# Altium PCB Draft1.PcbDoc
Units mil, origin at the board's own origin, x right, y up, seen from the top; angles counter-clockwise.
Board outline 2000 x 3350 mil, 2 copper layers (Top Layer, Bottom Layer); 65 components, 26 nets, 173 pads, 228 vias.
Unrouted connection lines stored in the file: 1.
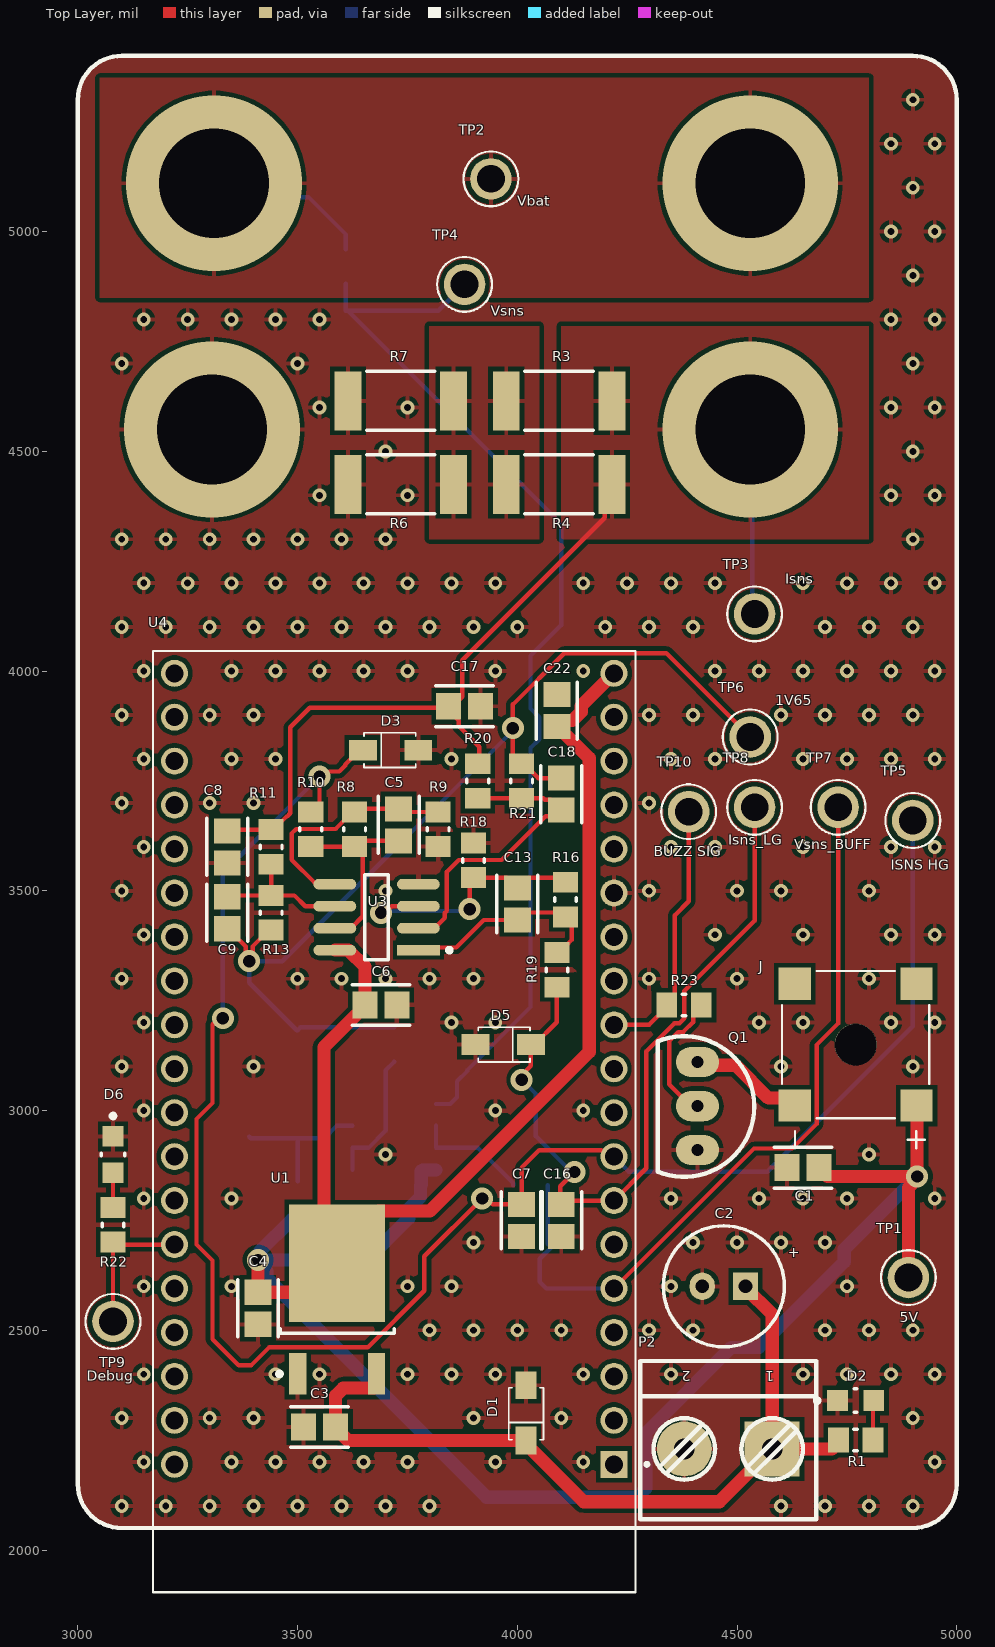
[diagram p0: Top Layer view]
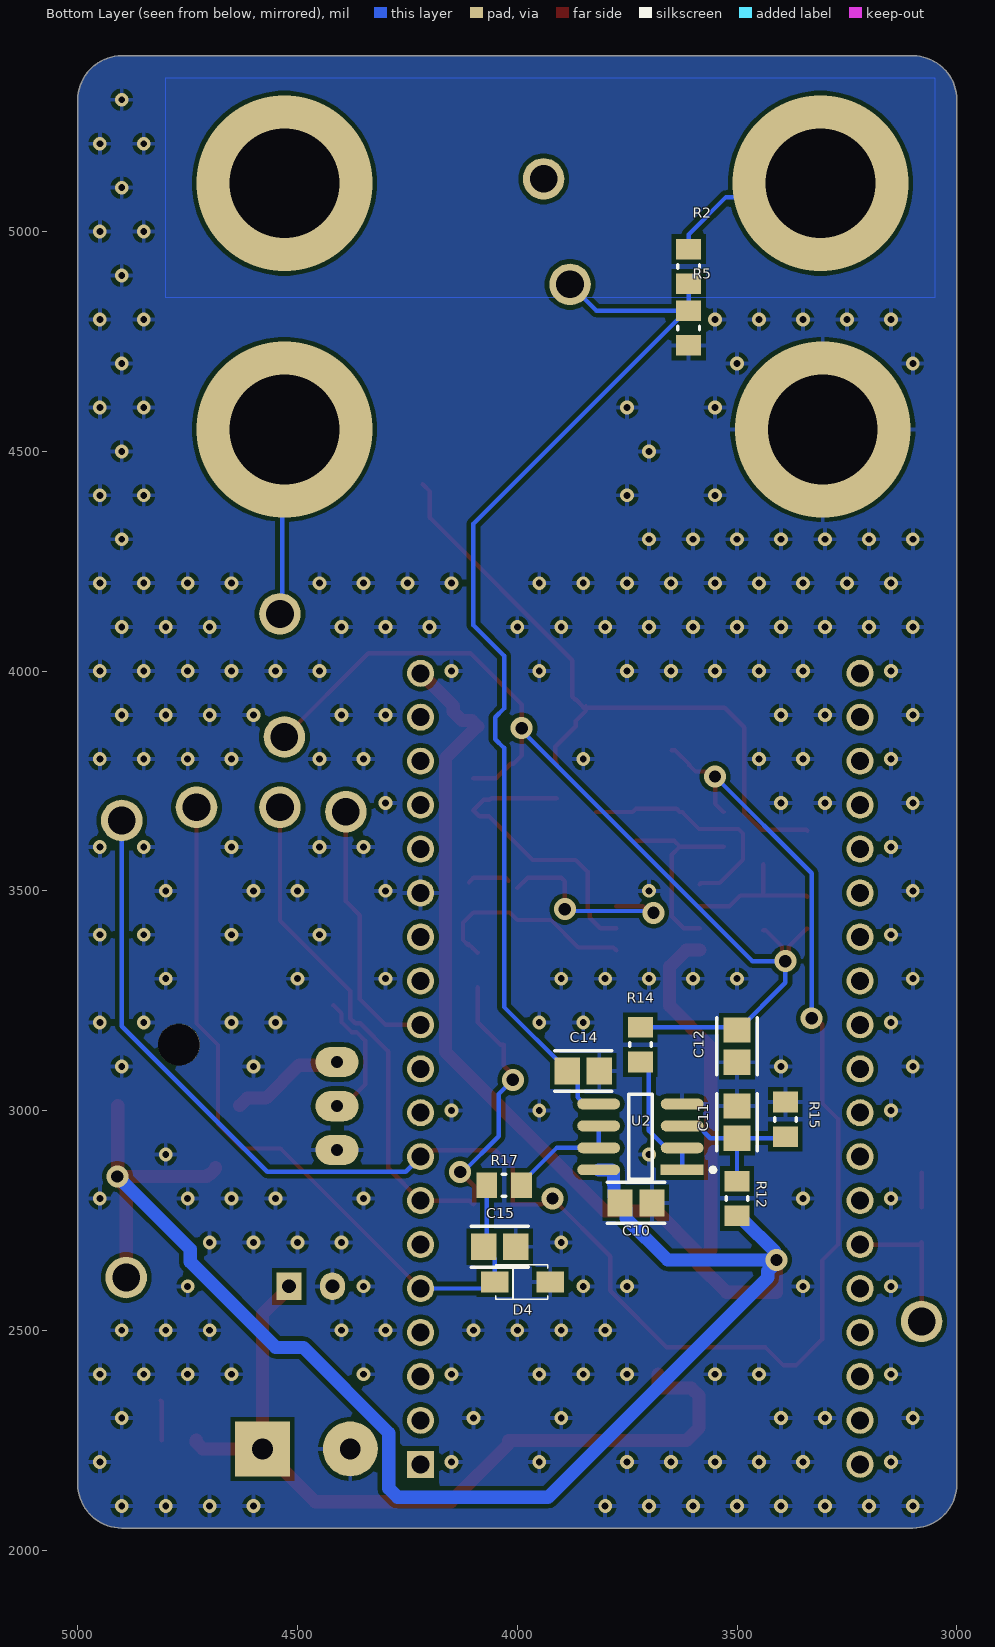
[diagram p1: Bottom Layer view, seen from below]
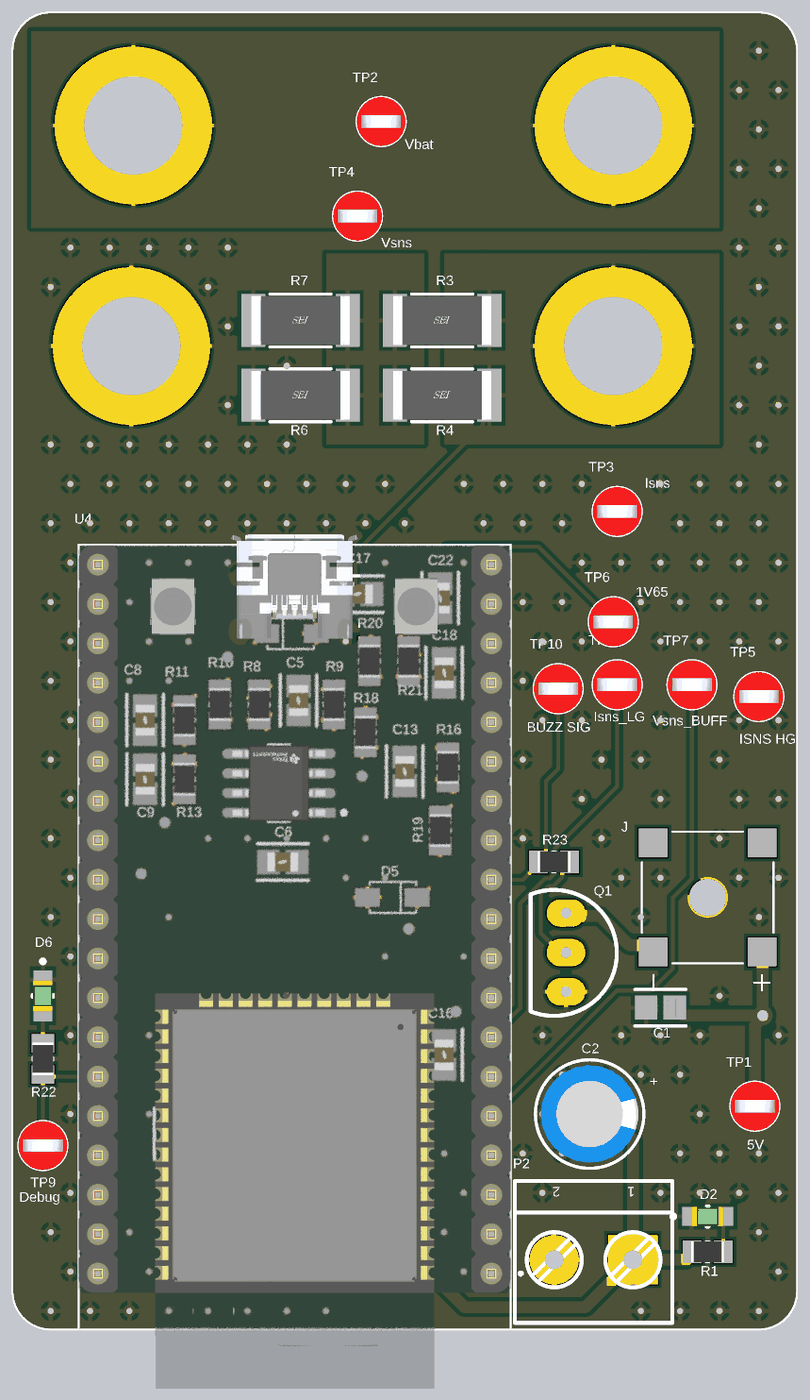
[diagram p2: 3D render of the assembled board from above, using the file's embedded part models]
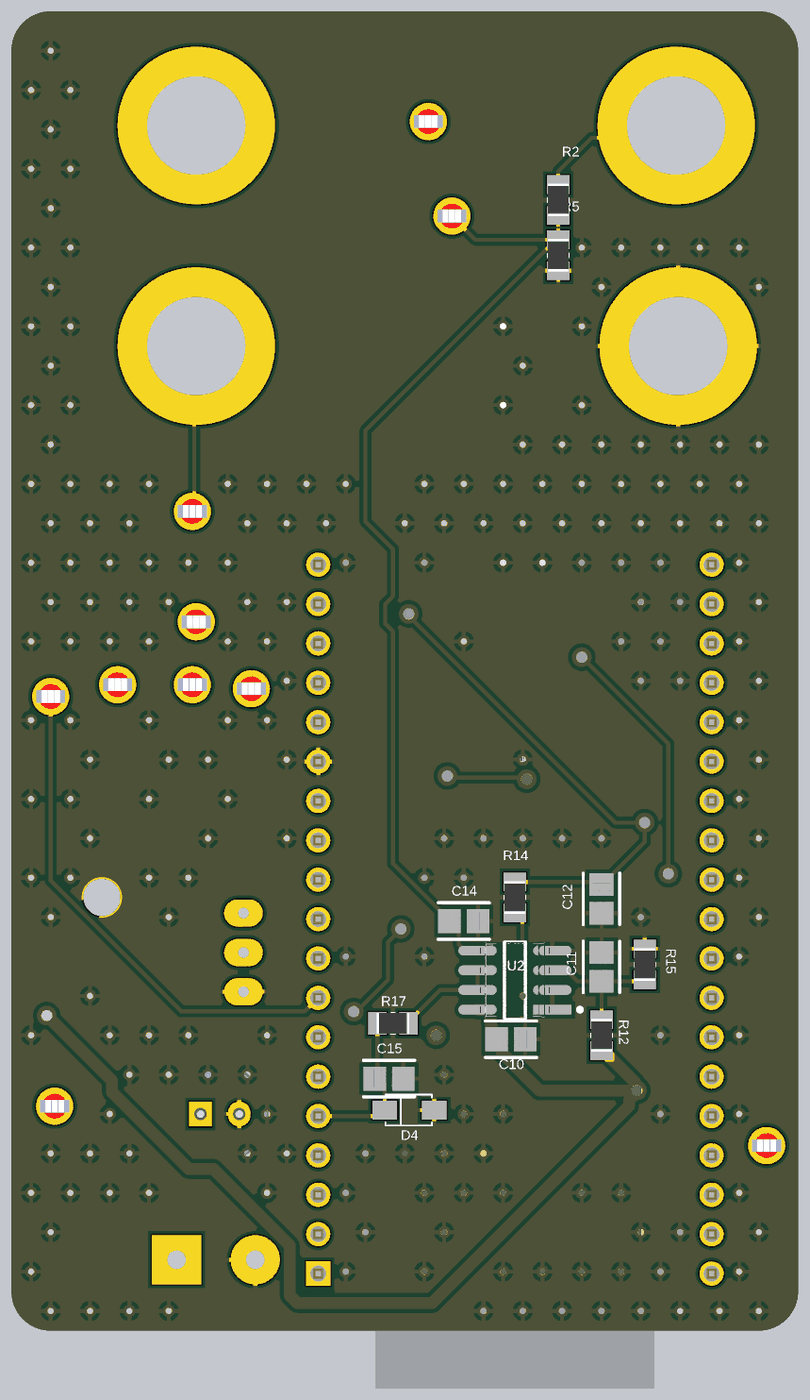
[diagram p3: 3D render of the assembled board from below, using the file's embedded part models]

## Layer stack, top to bottom
Top Solder: solder mask 0.4, Solder Resist, Dk 3.5
Top Layer: signal copper 1.4
Dielectric 1: dielectric 12.6, FR-4, Dk 4.8
Bottom Layer: signal copper 1.4
Bottom Solder: solder mask 0.4, Solder Resist, Dk 3.5

## Board outline
3000,2150 3000,5300 cw(c3100,5300) 3100,5400 4900,5400 cw(c4900,5300) 5000,5300 5000,2150 cw(c4900,2150) 4900,2050 3100,2050 cw(c3100,2150)

## Design rules (kind name [scope] priority, off if disabled: settings)
Clearance [All] p1: gap=10 ignorepadtopadclearanceinfootprint=TRUE except(0: Arc-Hole Track-Hole SMDPad-Hole THPad-Hole Via-Hole Fill-Hole Poly-Hole Region-Hole Text-Hole; 8: Arc-SMDPad Track-SMDPad)
PolygonConnect Lug_Points [InNetClass('Current_Path') vs InNetClass('Current_Path')] p1: connectstyle=Direct reliefconductorwidth=10 reliefentries=4 polygonreliefangle="90 Angle" airgapwidth=10
PolygonConnect PolygonConnect_1 [All] p2: connectstyle=Relief reliefconductorwidth=10 reliefentries=4 polygonreliefangle="90 Angle" airgapwidth=10
RoutingVias [All] p1: holewidth=28 width=50 viastyle="Through Hole" minholewidth=28 minwidth=50 maxholewidth=28 maxwidth=50
SolderMaskExpansion [All] p1: expansion=4 istentingtop=FALSE
SupplyNets "Schematic Supply Nets_1" [InNet('5V')] p1: voltage=0.000
SupplyNets "Schematic Supply Nets" [InNet('GND')] p2: voltage=0.000
Width Power_Width [InNetClass('Power')] p1: maxlimit=40 minlimit=30 preferedwidth=30
Width Width_1 [All] p2: maxlimit=10 minlimit=10 preferedwidth=10
30 further rules are at their usual default settings.

## Classes and differential pairs
net class Power: 5V 12V NetJ_N
component class ESP32: C1 C22 D6 J Q1 Q? R22 R23 TP9 TP10 U4
component class Sensing: C2 C3 C4 C5 C6 C7 C8 C9 C10 C11 C12 C13 C14 C15 C16 C17 C18 D1 D2 D3 D4 D5 P2 R1 R2 R3 R4 R5 R6 R7 R8 R9 R10 R11 R12 R13 R14 R15 R16 R17 R18 R19 R20 R21 TP1 TP2 TP3 TP4 TP5 TP6 TP7 TP8 U1 U2 U3

## Components (designator, comment, footprint, x,y, rotation, side; value= is the part's Value field where it differs from the comment)
C1 "CL21B104KBCNNNC" FP-CL21-IPC_A 4650,2870 r180 top
C2 "*" "CAP-RAD-2.5mm Pitch" 4470,2600 r180 top
C3 "CL21B104KBCNNNC" FP-CL21-IPC_A 3550,2280 r180 top
C4 "CL21B104KBCNNNC" FP-CL21-IPC_A 3410,2550 r270 top
C5 "CL21B104KBCNNNC" FP-CL21-IPC_A 3730,3650 r90 top
C6 "CL21B104KBCNNNC" FP-CL21-IPC_A 3690,3240 r0 top
C7 "CL21B104KBCNNNC" FP-CL21-IPC_A 4010,2750 r270 top
C8 "CL21B104KBCNNNC" FP-CL21-IPC_A 3340,3600 r270 top
C9 "CL21B104KBCNNNC" FP-CL21-IPC_A 3340,3450 r90 top
C10 "CL21B104KBCNNNC" FP-CL21-IPC_A 3730,2790 r180 bottom
C11 "CL21B104KBCNNNC" FP-CL21-IPC_A 3500,2973.55 r90 bottom
C12 "CL21B104KBCNNNC" FP-CL21-IPC_A 3500,3146.45 r270 bottom
C13 "CL21B104KBCNNNC" FP-CL21-IPC_A 4000,3470 r90 top
C14 "CL21B104KBCNNNC" FP-CL21-IPC_A 3850,3090 r180 bottom
C15 "CL21B104KBCNNNC" FP-CL21-IPC_A 4040,2690 r180 bottom
C16 "CL21B104KBCNNNC" FP-CL21-IPC_A 4100,2750 r270 top
C17 "CL21B104KBCNNNC" FP-CL21-IPC_A 3880,3920 r0 top
C18 "CL21B104KBCNNNC" FP-CL21-IPC_A 4100,3720 r270 top
C22 "CL21B104KBCNNNC" FP-CL21-IPC_A 4090,3910 r90 top
D1 "BZT52H-B4V7" SOD123 4020,2310 r270 top
D2 "LTST-C170GKT" FP-LTST-C170GKT-MFG 4770,2340 r0 top
D3 "BZT52H-B4V7" SOD123 3710,3820 r180 top
D4 "BZT52H-B4V7" SOD123 3990,2610 r0 bottom
D5 "BZT52H-B4V7" SOD123 3970,3150 r0 top
D6 "LTST-C170GKT" FP-LTST-C170GKT-MFG 3080,2900 r270 top
J "OWMB-858540SA-40-15" 3949-OWMB-858540SA-40-15CT-ND 4770,3150 r270 top
P2 "Connector2way" ece-TER-2.02 4580,2230 r270 top
Q1 "BC547/549" ece-TO-92Z 4410,3110.39 r270 top
R1 "RC0805FR-071KL" RESC2013X60X35ML10T20 4770,2250 r180 top
R2 "RC0805FR-071KL" RESC2013X60X35ML10T20 3610,4920.63 r90 bottom
R3 "D1MPAB2512QR002FA-T4" "2512 Res" 4095,4615 r0 top
R4 "D1MPAB2512QR002FA-T4" "2512 Res" 4095,4425 r0 top
R5 "RC0805FR-071KL" RESC2013X60X35ML10T20 3610,4780.63 r90 bottom
R6 "D1MPAB2512QR002FA-T4" "2512 Res" 3735,4425 r0 top
R7 "D1MPAB2512QR002FA-T4" "2512 Res" 3734.89,4615 r0 top
R8 "RC0805FR-071KL" RESC2013X60X35ML10T20 3630,3640 r270 top
R9 "RC0805FR-071KL" RESC2013X60X35ML10T20 3820,3640 r90 top
R10 "RC0805FR-071KL" RESC2013X60X35ML10T20 3530,3640 r90 top
R11 "RC0805FR-071KL" RESC2013X60X35ML10T20 3440,3600 r270 top
R12 "RC0805FR-071KL" RESC2013X60X35ML10T20 3500,2800 r270 bottom
R13 "RC0805FR-071KL" RESC2013X60X35ML10T20 3440,3450 r90 top
R14 "RC0805FR-071KL" RESC2013X60X35ML10T20 3720,3150 r90 bottom
R15 "RC0805FR-071KL" RESC2013X60X35ML10T20 3390,2980 r270 bottom
R16 "RC0805FR-071KL" RESC2013X60X35ML10T20 4110,3480 r270 top
R17 "RC0805FR-071KL" RESC2013X60X35ML10T20 4030,2830 r0 bottom
R18 "RC0805FR-071KL" RESC2013X60X35ML10T20 3900,3569.37 r270 top
R19 "RC0805FR-071KL" RESC2013X60X35ML10T20 4090,3320 r270 top
R20 "RC0805FR-071KL" RESC2013X60X35ML10T20 3910,3750 r270 top
R21 "RC0805FR-071KL" RESC2013X60X35ML10T20 4010,3750 r270 top
R22 "RC0805FR-071KL" RESC2013X60X35ML10T20 3080,2740 r270 top
R23 "RC0805FR-071KL" RESC2013X60X35ML10T20 4379.37,3240 r0 top locked
TP1 "5010" TP_5010 4890,2620 r0 top
TP2 "5010" TP_5010 3940,5120 r0 top
TP3 "5010" TP_5010 4540,4130 r0 top
TP4 "5010" TP_5010 3880,4880 r0 top
TP5 "5010" TP_5010 4900,3660 r0 top
TP6 "5010" TP_5010 4530,3850 r0 top
TP7 "5010" TP_5010 4730,3690 r0 top
TP8 "5010" TP_5010 4540,3690 r0 top
TP9 "5010" TP_5010 3080,2520 r0 top
TP10 "5010" TP_5010 4390,3680 r0 top
U1 "LD1117DT50CTR" TO-252_M 3590,2570 r90 top
U2 "LM358BIDR" FP-D0008A-IPC_A 3720,2940 r0 bottom
U3 "LM358BIDR" FP-D0008A-IPC_A 3680,3440 r180 top
U4 "ESP32-DEVKITC-32D" MODULE_ESP32-DEVKITC-32D 3720,2972.95 r180 top

## Footprints (in the part's own frame and the unit in brackets; to place one, negate y for a bottom-side part, rotate by r counter-clockwise, add the part's x,y. Pads: shape width x height; smd on the part's side, far side on the other; paste and mask are expansions set on the pad)
"2512 Res" [mil]
  rect 61.21x134.18 smd paste+0 mask+0: 1(-120.11,0) 2(120.11,0)
  silkscreen extent -78,-67 78,67, body extent -170,-87 170,87, height 10
3949-OWMB-858540SA-40-15CT-ND [mm] "SMT BUZZER"
  rect 1.86x1.86 smd: N(3.52,-3.52) P(3.52,3.52) SH1(-3.52,3.52) SH2(-3.52,-3.52)
  round 2.4 hole 2.4 unplated: ""(0,0)
  silkscreen extent -4.25,-4.25 6,4.25
"CAP-RAD-2.5mm Pitch" [mm] "Cap 6.3 X 11.2"
  rect 1.45x1.6 hole 0.8: 1(-1.25,0)
  oval 1.45x1.6 hole 0.8: 2(1.25,0)
  silkscreen extent -3.5,-3.5 3.5,3.5, body extent -3.15,-3.15 3.15,3.15, height 11.5
ece-TER-2.02 [mm]
  rect 3.175x3.175 hole 1.2: 1(0,0)
  round 3.175 hole 1.2: 2(0,-5.08)
  silkscreen extent -5.08,-7.62 4.06,2.54
ece-TO-92Z [mm]
  oval 1.75x2.5 hole 0.7: 1(0,0) 2(2.55,0) 3(5.08,0)
  silkscreen extent -1.49,-2.29 6.63,3.28
FP-CL21-IPC_A [mil]
  rect 57.27x61.27 smd paste+0 mask+0: 1(-36.45,0) 2(36.45,0)
  silkscreen extent -65,-46 65,46, body extent -85,-50 85,50, height 10
FP-D0008A-IPC_A [mil]
  rect 97.21x24.49 smd paste+0 mask+0: 1(-95.02,75)
  rrect100% 97.21x24.49 smd paste+0 mask+0: 2(-95.02,25) 3(-95.02,-25) 4(-95.02,-75) 5(95.02,-75) 6(95.02,-25) 7(95.02,25) 8(95.02,75)
  silkscreen extent -170,-97 27,97, body extent -118,-96 118,96, height 69
FP-LTST-C170GKT-MFG [mm]
  rect 1.2x1.2 smd paste+0 mask+0: 1(-1.05,0) 2(1.05,0)
  silkscreen extent -2.35,-0.67 0.08,0.67, body extent -1.75,-0.77 1.75,0.77, height 0.25
MODULE_ESP32-DEVKITC-32D [mm]
  rect 1.56x1.56 / inner round 1.56 / far side rect 1.56x1.56 hole 1.04: J2-1(-12.7,19.76)
  round 1.56 hole 1.04: J2-2(-12.7,17.22) J2-3(-12.7,14.68) J2-4(-12.7,12.14) J2-5(-12.7,9.6) J2-6(-12.7,7.06) J2-7(-12.7,4.52) J2-8(-12.7,1.98) J2-9(-12.7,-0.56) J2-10(-12.7,-3.1) J2-11(-12.7,-5.64) J2-12(-12.7,-8.18) J2-13(-12.7,-10.72) J2-14(-12.7,-13.26) J2-15(-12.7,-15.8) J2-16(-12.7,-18.34) J2-17(-12.7,-20.88) J2-18(-12.7,-23.42) J2-19(-12.7,-25.96) J3-1(12.7,19.76) J3-2(12.7,17.22) J3-3(12.7,14.68) J3-4(12.7,12.14) J3-5(12.7,9.6) J3-6(12.7,7.06) J3-7(12.7,4.52) J3-8(12.7,1.98) J3-9(12.7,-0.56) J3-10(12.7,-3.1) J3-11(12.7,-5.64) J3-12(12.7,-8.18) J3-13(12.7,-10.72) J3-14(12.7,-13.26) J3-15(12.7,-15.8) J3-16(12.7,-18.34) J3-17(12.7,-20.88) J3-18(12.7,-23.42) J3-19(12.7,-25.96)
  silkscreen extent -14.7,-27.25 13.95,27.15, body extent -13.97,-27.9 13.97,27.2, height 9.23
RESC2013X60X35ML10T20 [mm] "Chip Resistor, 2-Leads, Body 2.1x1.35mm, IPC Low Density"
  rect 1.2x1.45 smd: 1(-1,0) 2(1,0)
  silkscreen extent -0.1,-0.63 0.1,0.63, body extent -1.05,-0.68 1.05,0.67, height 0.6
SOD123 [mm] "SOD-123; 2 Leads; Body 2.7 x 1.6 mm, (LxW)"
  rect 1.6x1.2 smd: 1(-1.65,0) 2(1.55,0)
  silkscreen extent -1.5,-1 1.5,1, body extent -1.8,-0.86 1.8,0.86, height 1.21
TO-252_M [mm] "D-PAK, 4-Leads, Body 6.1x6.5mm, Pitch 2.28mm, Lead Span 9.7mm, IPC Low Density"
  rect 2.4x1 smd: 1(-4.3,2.28) 3(-4.3,-2.28)
  rect 6.8x5.55 smd: 4(2.1,0)
  silkscreen extent -4.42,-3.3 -1.7,3.45, body extent -1.95,-3.3 4.25,3.3, height 2.4
TP_5010 [mm]
  round 2.4 hole 1.6: TP(0,0)
  silkscreen extent -1.59,-1.58 1.59,1.58, body extent -1.59,-1.59 1.59,1.59, height 8.13

## Part data
C1 C3 C4 C5 C6 C7 C8 C9 C10 C11 C12 C13 C14 C15 C16 C17 C18 C22: library part 0805CAP, "0805 Cap General Purpose", Capacitance=999uF, Case Code (Imperial)=0805, Case Code (Metric)=2012, Dielectric=X7R, Max Operating Temperature=125°C, Min Operating Temperature=-55°C, Tolerance=10%, Voltage=50V, Case/Package=0805, Contact Plating=Tin, Depth=1.25mm, Height=0.85mm, Lead Free="Lead Free", Length=2mm, Material=Ceramic, Mount="Surface Mount", Packaging="Tape and Reel", Radiation Hardening=No, Thickness=0.037inch, Voltage Rating=50V, Voltage Rating (DC)=50V, Width=0.049inch
C2: library part ElecCap_TH_2P0, "Electrolytic capacitor with radial package, 2mm pitch and 5.2mm diameter", LatestRevisionDate=17-Jul-2002, LatestRevisionNote="Re-released for DXP Platform.", PackageDescription="Polarized Capacitor; 2 Leads", PackageReference=POLAR0.8, Published=8-Jun-2000, Publisher="Altium Limited"
D1 D3 D4 D5: library part Zener_SMT_SOD123, "SMT zener diode with SOD123 package", Manufacturer="Nexperia USA Inc.", Manufacturer Part Number=BZT52H-B4V7,115, Operating Temperature="-65°C ~ 150°C (TA)", Package / Case=SOD-123F, Supplier Part Number 1=1727-1611-1-ND, Tolerance=±2%, Category="Discrete Semiconductor Products", ComponentLink1Description=https://assets.nexperia.com/documents/data-sheet/BZT52H_SER.pdf, ComponentLink1URL=https://assets.nexperia.com/documents/data-sheet/BZT52H_SER.pdf, Mounting Type="Surface Mount", Packaging="Cut Tape (CT)", Part Status=Active, Pricing 1="1=0.51, 10=0.408, 100=0.2164, 500=0.14232, 1000=0.09678 (NZD)", RoHS="RoHS Compliant", Stock 1=0, Supplier 1=Digi-Key, Supplier Device Package=SOD-123F
D2 D6: library part CMP-1674-00002-6, "LED yellow green 0805 wavelength 569nm light intensity 6mcd Front Mounting", Case Code (Imperial)=0805, Case Code (Metric)=2012, Color=Green, Current=4A, Forward Current=30mA, Forward Voltage=2.1V, Lens Color=Colorless, Manufacturer=Lite-On, Max Operating Temperature=85°C, Min Operating Temperature=-55°C, Package Quantity=1, Power Dissipation=100mW, Reverse Voltage=5V, Test Current=10mA, Case/Package=0805, Category=LEDs, China RoHS=Compliant, ComponentLink1Description=https://datasheet.octopart.com:443/LTST-C170GKT-Lite-On-datasheet-180605137.pdf?src-supplier=IHS, ComponentLink1URL=https://datasheet.octopart.com:443/LTST-C170GKT-Lite-On-datasheet-180605137.pdf?src-supplier=IHS, ComponentLink2Description=https://datasheet.octopart.com:443/LTST-C170GKT-Lite-On-datasheet-141439001.pdf?src-supplier=Upverter, ComponentLink2URL=https://datasheet.octopart.com:443/LTST-C170GKT-Lite-On-datasheet-141439001.pdf?src-supplier=Upverter, ComponentLink3Description=https://datasheet.octopart.com:443/LTST-C170GKT-Lite-On-datasheet-159307.pdf?src-supplier=Arrow+Electronics, ComponentLink3URL=https://datasheet.octopart.com:443/LTST-C170GKT-Lite-On-datasheet-159307.pdf?src-supplier=Arrow+Electronics, ComponentLink4Description=https://datasheet.octopart.com:443/LTST-C170GKT-Lite-On-datasheet-8330158.pdf?src-supplier=TME, ComponentLink4URL=https://datasheet.octopart.com:443/LTST-C170GKT-Lite-On-datasheet-8330158.pdf?src-supplier=TME, ComponentLink5Description=https://datasheet.octopart.com:443/LTST-C170GKT-Lite-On-datasheet-26684672.pdf?src-supplier=Future+Electronics, ComponentLink5URL=https://datasheet.octopart.com:443/LTST-C170GKT-Lite-On-datasheet-26684672.pdf?src-supplier=Future+Electronics, ComponentLink6Description=https://datasheet.octopart.com:443/LTST-C170GKT-Lite-On-datasheet-59241.pdf?src-supplier=DigiKey, ComponentLink6URL=https://datasheet.octopart.com:443/LTST-C170GKT-Lite-On-datasheet-59241.pdf?src-supplier=DigiKey, ComponentLink7Description=https://datasheet.octopart.com:443/LTST-C170GKT-Lite-On-datasheet-14174986.pdf?src-supplier=iiiC, ComponentLink7URL=https://datasheet.octopart.com:443/LTST-C170GKT-Lite-On-datasheet-14174986.pdf?src-supplier=iiiC, Country of Origin="Mainland China", Depth=1.25mm, Dominant Wavelength=569nm, Export Control Classification Number (ECCN) Code=EAR99, Harmonized Tariff Schedule (HTS) Code=8541.40.20.00, Height=1.1mm, Illumination Color=Green, Introduction Date=1997-12-01, Lead Free="Lead Free", Length=2mm, Lens Style=Diffused, Lens Transparency=Clear, Lifecycle Status=Production, Luminous Intensity=6mcd, Manufacturer Part Number=LTST-C170GKT, Mount="Surface Mount", Mounting Technology="Surface Mount", Number of Circuits=1, Number of Elements=1, Number of LEDs=1, Number of Pins=2, Number of Terminals=2, Packaging="Tape and Reel", Peak Wavelength=565nm, Pins=2, Power Rating=100mW, Pricing="3000=0.03046, 6000=0.02977, 12000=0.02908, 24000=0.0284, 48000=0.02771 (USD)", Radiation Hardening=No, REACH SVHC=Yes, RoHS=Compliant, Schedule B="8541402000, 8541402000|8541402000|8541402000|8541402000|8541402000|8541402000|8541402000|8541402000|8541402000|8541402000|8541402000|8541402000|8541402000|8541402000|8541402000|8541402000|8541402000|8541402000|8541402000|8541402000|8541402000|8541402000|8541402000|85", Shape=Rectangular, Stock=408000, Supplier=Avnet, Supplier Part Number=LTST-C170GKT, Terminal Pitch=2.1mm, Viewing Angle=130°, Voltage=5V, Wavelength=565nm, Width=1.25mm
J: "Buzzer Magn 5V 8.5X8.5MMSMD", Manufacturer="Ole Wolff", Supplier Part Number=3949-OWMB-858540SA-40-15DKR-ND, Category="Audio Products", Manufacturer Part Number=OWMB-858540SA-40-15, Pricing="1=1.01, 10=0.79, 25=0.7184, 50=0.6688, 100=0.6234, 250=0.56864, 500=0.5355 (USD)", Supplier=DigiKey
P2: "2 way screw connector"
Q1: "NPN Transistor"
R1 R2 R5 R8 R9 R10 R11 R12 R13 R14 R15 R16 R17 R18 R19 R20 R21 R22 R23: library part 0805RESISTOR, "0805 General Purpose  0.125W SMD", Case Code (Imperial)=0805, Case Code (Metric)=2012, Manufacturer=Yageo, Max Operating Temperature=155degC, Max Power Dissipation=125mW, Min Operating Temperature=-55degC, Package Description="2-Pin Surface Mounted Device, Body 2 x 1.25 mm", Package Quantity=1, Resistance=9K99, Temperature Coefficient=100ppm/degreesC, Tolerance=1%, Voltage Rating=150V, Case/Package=0805, Composition=ThickFilm, Datasheet URL=http://www.yageo.com/NewPortal/yageodocoutput?fileName=/pdf/R-Chip/PYu-RC_Group_51_RoHS_L_5.pdf, Datasheet Version="Rev. 5, 10/2016", Depth=1.25mm, Height=0.024inch, Lead Free=LeadFree, Length=0.079inch, Manufacturer URL=http://www.yageo.com/, Military Standard=Not, Number of Pins=2, Number of Terminations=2, Package Reference=0805, Packaging=TapeandReel, Power Rating=125mW, REACH SVHC=Unknown, RoHSCompliant=true, Termination=SMD/SMT, Voltage Rating (DC)=150V, Width=0.049inch
R3 R4 R6 R7: "Res 0.002 Ohm 1% 2W 2512", Manufacturer="Thin Film Tech", Supplier Part Number=4463-D1MPAB2512QR002FA-T4CT-ND, Category="Chip SMD Resistors", Manufacturer Part Number=D1MPAB2512QR002FA-T4, Pricing="1=0.47, 10=0.299, 25=0.2532, 50=0.2248, 100=0.2006, 250=0.17396, 500=0.1573, 1000=0.14313 (USD)", Stock=90233, Supplier=DigiKey
TP1 TP2 TP3 TP4 TP5 TP6 TP7 TP8 TP9 TP10: "Test Point MultiPurpose THM .445 L .125 OD Heat Resistant Nylon 46 Red", Package="NON STANDARD-1 Keystone", Check_prices=https://www.snapeda.com/parts/5010/Keystone/view-part/?ref=eda, MF="Keystone Electronics", MP=5010, SnapEDA_Link=https://www.snapeda.com/parts/5010/Keystone/view-part/?ref=snap
U1: library part CMP-0244-00109-1, "Fixed Low Drop Positive Voltage Regulator, 5V, 3-Pin DPAK, Tape and Reel", ComponentLink1Description="Manufacturer URL", ComponentLink1URL=http://www.st.com, ComponentLink2Description=Datasheet, ComponentLink2URL=http://www.st.com/internet/com/TECHNICAL_RESOURCES/TECHNICAL_LITERATURE/DATASHEET/CD00000544.pdf, DatasheetVersion=1/11/2011, PackageDescription="3-Pin Transistor Outline Package 2.28 mm Pitch, 9.7 mm Lead Span (DPAK)", PackageReference=TO-252, PackageVersion=2011
U2 U3: library part CMP-04895-000094-1, "IC OPAMP GP 2 CIRCUIT 8SOIC", RoHS Compliant=Yes
U4: "WiFi Development Tools (802.11) ESP32 General Development Kit, ESP32-WROOM-32D on the board", Package=None, Check_prices=https://www.snapeda.com/parts/ESP32-DEVKITC-32D/Espressif+Systems/view-part/?ref=eda, MF="Espressif Systems", MP=ESP32-DEVKITC-32D, SnapEDA_Link=https://www.snapeda.com/parts/ESP32-DEVKITC-32D/Espressif+Systems/view-part/?ref=snap

## Via types
v1: diameter 31.5, hole 15.75, Top Layer to Bottom Layer, tented both sides, 213 vias
v2: diameter 50, hole 28, Top Layer to Bottom Layer, tented both sides, 11 vias
v3: diameter 400, hole 250, Top Layer to Bottom Layer, 4 vias

## Nets (pads, with @x,y where several pads share a name; then routed paths per layer and width w, separated by ;. In a path a pad name is that pad's centre, name@x,y a point inside that pad or via, vN(x,y) a via of type N, cw(c..) or ccw(c..) an arc to the next point about the centre after c; other vN are vias at no path point)
1v65: C9.1 C12.1 C18.1 R13.1 R14.2 R21.1 TP6.TP | length 2353.4
  Top Layer w10: C9.1 3342,3413.55 3382.35,3373.2 3382.35,3347.65 v2(3390,3340) 3397.65,3347.65 3397.65,3373.2 3435.08,3410.63 R13.1 ; C18.1 4047.84,3756.45 4014.92,3789.37 R21.1 4008.62,3789.37 3990,3807.99 v2(3990,3870) 3990,3924.1 4106.61,4040.71 4339.29,4040.71 TP6.TP
  Bottom Layer w10: R14.2 3506.47,3189.37 C12.1 3498,3182.9 3390,3290.9 v2(3390,3340) 3465,3340 3990,3865 v2(3990,3870)
5V: C1.1 C4.1 C6.1 C10.1 C22.1 J.P R12.2 TP1.TP U1.4 U2.8 U3.8 U4.J2-19 | length 6276.5
  Top Layer w30: v2(3410,2660) C4.1 3523.77,2586.45 U1.4 ; U3.8 3615.83,3365 3653.55,3327.28 3653.55,3238 3560,3144.45 3560,2682.68 U1.4 ; U4.J2-19 4145.63,3920.63 4145.63,3907.46 4125.36,3887.19 4103.63,3887.19 C22.1 4092,3873.55 4163.54,3802.01 4163.54,3133.54 3801.54,2771.54 3684.25,2771.54 3590,2677.28 U1.4 ; C1.1 4686.45,2868 4700.08,2854.37 4702.08,2854.37 4706.45,2850 v2(4910,2850) ; TP1.TP 4890,2824.59 4910,2844.59 v2(4910,2850) ; J.P 4909.29,3010.71 4909.29,2850.71 v2(4910,2850)
  Bottom Layer w30: R12.2 3491.38,2752.01 3486.46,2752.01 3413.83,2679.38 3413.83,2663.83 v2(3410,2660) ; U2.8 3784.17,2865 3781.42,2862.25 3781.42,2831.39 3780.08,2830.06 3780.08,2803.63 C10.1 3752.81,2776.37 3752.81,2754.64 3658.18,2660 v2(3410,2660) ; v2(4910,2850) 4744.18,2684.18 4744.18,2655.5 4549.55,2460.87 4487.13,2460.87 4292.5,2266.24 4292.5,2140.07 4272.43,2120 3930,2120 3430,2620 3430,2634.59 3410,2654.59 v2(3410,2660)
12V: C2.1 C3.1 D1.2 P2.1 R1.2 U1.3 | length 1877.4
  Top Layer w30: U1.3 3679.76,2373.15 3675.08,2368.46 3604.02,2368.46 3586.45,2350.89 3586.45,2278 3615.47,2248.98 D1.2 4020,2241.1 4151.1,2110 4460,2110 P2.1 ; C2.1 4519.21,2597.05 4580,2536.26 P2.1 ; R1.2 4730.63,2245.08 4715.55,2230 P2.1
GND: C1.2 C2.2 C3.2 C4.2 C6.2 C7.2 C8.2 C10.2 C11.2 C12.2 C14.2 C15.2 C16.2 C17.2 C22.2 D1.1 D2.1 D3.1 D4.1 D5.1 D6.1 P2.2 Q1.3 R5.1 R6.1 R7.1 R9.1 R15.1 R18.1 U1.1 U2.4 U3.4 U4.J2-14
  other v1: 3100,2100 3200,2100 3300,2100 3400,2100 3500,2100 3600,2100 3700,2100 3800,2100 4600,2100 4700,2100 4800,2100 4900,2100 3150,2200 3350,2200 3450,2200 3550,2200 3650,2200 3750,2200 3950,2200 4150,2200 4950,2200 3100,2300 3300,2300 3400,2300 3900,2300 4100,2300 4900,2300 3150,2400 3450,2400 3550,2400 3750,2400 3850,2400 3950,2400 4150,2400 4350,2400 4650,2400 4750,2400 4850,2400 4950,2400 3800,2500 3900,2500 4000,2500 4100,2500 4300,2500 4400,2500 4700,2500 4800,2500 4900,2500 3150,2600 3350,2600 3750,2600 3850,2600 4350,2600 4750,2600 3900,2700 4400,2700 4500,2700 4600,2700 4700,2700 3150,2800 3350,2800 4350,2800 4550,2800 4650,2800 4750,2800 4950,2800 3700,2900 4800,2900 3150,3000 3950,3000 4150,3000 3100,3100 3400,3100 4600,3100 4900,3100 3150,3200 3850,3200 3950,3200 4550,3200 4650,3200 4850,3200 4950,3200 3100,3300 3500,3300 3600,3300 3700,3300 3800,3300 3900,3300 4300,3300 4500,3300 4800,3300 3150,3400 4450,3400 4650,3400 4850,3400 4950,3400 3100,3500 3700,3500 4300,3500 4500,3500 4600,3500 4800,3500 3150,3600 4350,3600 4450,3600 4650,3600 4850,3600 4950,3600 3100,3700 3300,3700 3400,3700 4300,3700 3150,3800 3350,3800 3450,3800 3850,3800 4350,3800 4450,3800 4650,3800 4750,3800 4850,3800 4950,3800 3100,3900 3300,3900 3400,3900 4300,3900 4400,3900 4600,3900 4700,3900 4800,3900 4900,3900 3150,4000 3350,4000 3450,4000 3550,4000 3650,4000 3750,4000 3950,4000 4150,4000 4450,4000 4550,4000 4650,4000 4750,4000 4850,4000 4950,4000 3100,4100 3200,4100 3300,4100 3400,4100 3500,4100 3600,4100 3700,4100 3800,4100 3900,4100 4000,4100 4200,4100 4300,4100 4400,4100 4700,4100 4800,4100 4900,4100 3150,4200 3250,4200 3350,4200 3450,4200 3550,4200 3650,4200 3750,4200 3850,4200 3950,4200 4150,4200 4250,4200 4350,4200 4450,4200 4650,4200 4750,4200 4850,4200 4950,4200 3100,4300 3200,4300 3300,4300 3400,4300 3500,4300 3600,4300 3700,4300 4900,4300 3550,4400 3750,4400 4850,4400 4950,4400 3700,4500 4900,4500 3550,4600 3750,4600 4850,4600 4950,4600 3100,4700 3500,4700 4900,4700 3150,4800 3250,4800 3350,4800 3450,4800 3550,4800 4850,4800 4950,4800 4900,4900 4850,5000 4950,5000 4900,5100 4850,5200 4950,5200 4900,5300
  other v3: 3305,4550
Isns: C8.1 C17.1 R3.2 R4.2 R11.1 R20.1 TP3.TP | length 1978.5
  Top Layer w10: C8.1 3342.92,3639.37 R11.1@3444.92,3639.37 ; R11.1 R11.1@3444.92,3639.37 ; C17.1@3843.55,3910 3867.19,3886.37 3867.19,3874.36 3913.55,3827.99 3913.55,3792.92 R20.1 ; C17.1 3843.55,3916.45 3527.89,3916.45 3483.54,3872.1 3483.54,3676.28 3476.47,3669.21 3474.76,3669.21 R11.1@3444.92,3639.37 ; C17.1@3850,3916.7 3850,3918.45 3867.19,3935.63 3868.94,3935.63 3874.81,3941.51 3874.81,4024.81 4198.77,4348.77 4198.77,4408.66 R4.2
  Bottom Layer w10: v3(4530,4550) 4535,4545 4535,4135 TP3.TP
Isns_HG: C7.1 D3.2 R10.2 TP5.TP U4.J2-8 | length 4189.4
  Top Layer w10: v2@3330,3220 3306.37,3196.37 3306.37,3017.16 3270,2980.79 3270,2695.11 3306.37,2658.74 3306.37,2479.53 3365.9,2420 3394.21,2420 3435.17,2460.95 3659.77,2460.95 3788.49,2589.67 3788.49,2668.49 v2(3920,2800) 3930.82,2800 3944.38,2786.45 C7.1 4010,2870.11 4049.89,2910 4191.09,2910 4206.09,2895 U4.J2-8 ; R10.2 3531.38,3679.37 3550,3697.99 v2(3550,3760) 3560.82,3760 3572.2,3771.38 3594.58,3771.38 3608.34,3785.14 3608.34,3787.24 3641.1,3820 D3.2
  Bottom Layer w10: v2(3330,3210) 3330,3540 v2(3550,3760) ; U4.J2-8 4254.06,2860.94 4568.97,2860.94 4900,3191.97 TP5.TP
Isns_LG: C16.1 D5.2 R19.2 TP8.TP U4.J2-7 | length 1757.3
  Top Layer w10: v2(4010,3070) 4010,3080.82 4031.02,3101.85 D5.2 4038.9,3150 4090,3201.1 R19.2 ; v2(4130,2860) 4098,2828 4098,2788.45 C16.1 4108.55,2795 U4.J2-7 4293.71,2868.71 4293.71,3134.59 4357.57,3198.46 4369.01,3198.46 4380.12,3209.57 4380.12,3271.93 4540,3431.81 TP8.TP
  Bottom Layer w10: v2(4010,3070) 4042.29,3037.71 4042.29,2941.25 4123.54,2860 v2(4130,2860)
NetC5_1: C5.1 R8.2 R10.1 U3.7 | length 446.3
  Top Layer w10: R10.1 R8.2 ; U3.7 3621.34,3415 3648.58,3442.25 3648.58,3582.05 R8.2 ; C5.1 3642.92,3613.55 R8.2
NetC5_2: C5.2 R8.1 R9.2 U3.5 | length 541
  Top Layer w10: U3.5 3582.2,3517.77 3539.48,3517.77 3486.46,3570.79 3486.46,3630.47 3496.74,3640.75 3586.46,3640.75 3625.08,3679.37 R8.1 3637.08,3686.45 C5.2 3737.08,3679.37 R9.2
NetC9_2: C9.2 R11.2 R13.2 U3.6 | length 327.5
  Top Layer w10: C9.2 3342.92,3489.37 R13.2 ; R11.2 R13.2 ; U3.6 3517.2,3465 3492.83,3489.37 R13.2
NetC11_1: C11.1 R12.1 R15.2 U2.3 | length 345.7
  Bottom Layer w10: R15.2 3393.53,2937.1 C11.1 ; R12.1 C11.1 ; U2.3 3588.62,2965 3560.72,2937.1 C11.1
NetC13_1: C13.1 R16.2 R19.1 U3.1 | length 519.6
  Top Layer w10: U3.1 3781.08,3371.06 3861.06,3371.06 3923.55,3433.55 C13.1 4017.08,3450.63 R16.2@4100,3450.63 ; R19.1 4091.38,3359.37 4101.03,3369.03 R19.1@4110,3377.99 ; R19.1@4111.77,3376.22 4123.54,3387.99 4123.54,3427.09 R16.2@4100,3450.63 ; R16.2@4100,3450.63 R16.2 ; R16.2@4100,3450.63 R16.2 ; R16.2@4100,3450.63 R16.2
NetC13_2: C13.2 R16.1 R18.2 U3.3 | length 578.1
  Top Layer w10: v2(3690,3450) 3699.34,3450 3714.34,3465 U3.3 ; v2(3891.72,3458.28) 3891.72,3521.72 R18.2 3976.45,3530 C13.2 ; C13.2@4020,3522.9 4026.47,3529.37 4100,3529.37 R16.1
  Bottom Layer w10: v2(3690,3450) 3694.14,3454.14 3887.57,3454.14 v2(3891.72,3458.28)
NetC18_2: C18.2 R20.2 R21.2 U3.2 | length 695.9
  Top Layer w10: U3.2 3811.38,3415 3835.25,3438.87 3835.25,3450.33 3839.7,3454.78 3839.7,3543.08 3866.74,3570.12 3964.57,3570.12 4064.37,3669.92 4086.37,3669.92 C18.2 4076.37,3707.19 4062.81,3707.19 4059.37,3710.63 R21.2 R20.2
NetD2_2: D2.2 R1.1 | length 90.8
  Top Layer w10: R1.1 4809.37,2338.03 D2.2
NetD6_2: D6.2 R22.1 | length 79.3
  Top Layer w10: R22.1 D6.2
NetJ_N: J.N Q1.1 | length 262.4
  Top Layer w30: Q1.1 4417.44,3102.95 4497.05,3102.95 4571.57,3028.43 4614.4,3028.43 J.N
NetQ1_2: Q1.2 R23.2 | length 302.2
  Top Layer w10: Q1.2 4395.24,3010 4345.79,3059.45 4345.79,3158.39 4365.86,3178.46 4377.29,3178.46 4400.12,3201.28 4400.12,3221.38 R23.2
NetR3_1: R3.1 R4.1 R6.2 R7.2
NetR14_1: R14.1 U2.1 U2.2 | length 306.7
  Bottom Layer w10: U2.1 U2.2 3661.34,2915 3700.75,2954.41 3700.75,3092.01 3719.37,3110.63 R14.1
NetR17_1: R17.1 U2.6 U2.7 | length 263.7
  Bottom Layer w10: U2.6 U2.7 3910.55,2915 3990.63,2834.92 R17.1
NetR22_2: R22.2 TP9.TP U4.J3-6 | length 323
  Top Layer w10: TP9.TP R22.2 3085.63,2695 U4.J3-6
NetR23_1: R23.1 TP10.TP U4.J2-11 | length 602.2
  Top Layer w10: U4.J2-11 4299.92,3195 4358.62,3253.7 4358.62,3444.65 4390,3476.03 TP10.TP
Vbat: R2.2 TP2.TP | length 381.8
  Bottom Layer w10: v3(3310,5110) 3341.49,5078.51 3525,5078.51 3610,4993.51 R2.2
  other v3: 4530,5110
Vsns: C14.1 R2.1 R5.2 TP4.TP U2.5 | length 2515.6
  Bottom Layer w10: R2.1 R5.2 R5.2@3614.92,4820 ; U2.5 3847.46,3015 3862.81,3030.35 3862.81,3066.37 C14.1 3886.45,3092 4030,3235.55 4030,3825.15 4050,3845.15 4050,3894.85 4030,3914.85 4030,4034.63 4100,4104.63 4100,4334.92 R5.2@3614.92,4820 ; TP4.TP 3820,4820 R5.2@3614.92,4820
Vsns_BUFF: C15.1 D4.2 R17.2 TP7.TP U4.J2-5 | length 1765.6
  Top Layer w10: U4.J2-5 4538.63,2913.63 4625.25,2913.63 4681.03,2969.42 4681.03,3149.06 4730,3198.03 TP7.TP
  Bottom Layer w10: R17.2 4069.37,2697.08 C15.1 4076.45,2688 4051.02,2662.58 D4.2 4066.02,2595 U4.J2-5
pads on no net: J. J.SH1 J.SH2 U4.J2-1 U4.J2-2 U4.J2-3 U4.J2-4 U4.J2-6 U4.J2-9 U4.J2-10 U4.J2-12 U4.J2-13 U4.J2-15 U4.J2-16 U4.J2-17 U4.J2-18 U4.J3-1 U4.J3-2 U4.J3-3 U4.J3-4 U4.J3-5 U4.J3-7 U4.J3-8 U4.J3-9 U4.J3-10 U4.J3-11 U4.J3-12 U4.J3-13 U4.J3-14 U4.J3-15 U4.J3-16 U4.J3-17 U4.J3-18 U4.J3-19

## Polygon pours and split planes (outlines as drawn)
GND on Top Layer "GND_L01_P006" (solid, remove dead copper, pour order 6): 3000,2150 3000,5300 cw(c3100,5300) 3100,5400 4900,5400 cw(c4900,5300) 5000,5300 5000,2150 cw(c4900,2150) 4900,2050 3100,2050 cw(c3100,2150)
Vbat on Top Layer "Current" (solid, pour order 2): 3050,5350 3050,4850 4800,4850 4800,5350
Isns on Top Layer "NONET_L02_P-001" (solid, pour order 3): 4800,4785 4800,4300 4105,4300 4100,4295 4100,4785
NetR3_1 on Top Layer "NONET_L02_P-001" (solid, pour order 4): 3800,4785 4050,4785 4050,4300 3800,4300
GND on Bottom Layer "GND_L02_P001" (solid, pour order 1): 3000,2150 3000,5300 cw(c3100,5300) 3100,5400 4900,5400 cw(c4900,5300) 5000,5300 5000,2150 cw(c4900,2150) 4900,2050 3100,2050 cw(c3100,2150)
Vbat on Bottom Layer "VBAT_L02_P007" (solid, pour order 7): 3050,5350 3050,4850 4800,4850 4800,5350

## Silkscreen, mask and mechanical layers (free items; w line width, h text height)
Top Overlay:
  the board outline again, w10
  text "Vbat" at 4000.04,5050.41 h40
  text "Vsns" at 3940.04,4800.41 h40
  text "Isns" at 4610,4190.41 h40
  text "1V65" at 4587.29,3914.05 h40
  text "Isns_LG" at 4480,3597.1 h40
  text "Vsns_BUFF" at 4630.04,3587.1 h40
  text "BUZZ SIG" at 4310,3570.44 h40
  text "ISNS HG" at 4850,3540.44 h40
  text "5V" at 4870,2510.44 h40
  text "Debug" at 3020,2377.51 h40

## Text inside footprints (layer, text, board x,y; h text height)
C2: Top Overlay "+" at 4643.23,2694.49 h40 r180
P2: Top Overlay "2" at 4395,2415 h40 r180; Top Overlay "1" at 4585,2415 h40 r180